# Altium PCB IR2104S_V2.PcbDoc
Units mil, origin at the board's own origin, x right, y up, seen from the top; angles counter-clockwise.
Board outline 3085 x 1190 mil, 2 copper layers (Top Layer, Bottom Layer); 22 components, 22 nets, 82 pads, 14 vias.
Unrouted connection lines stored in the file: 10.
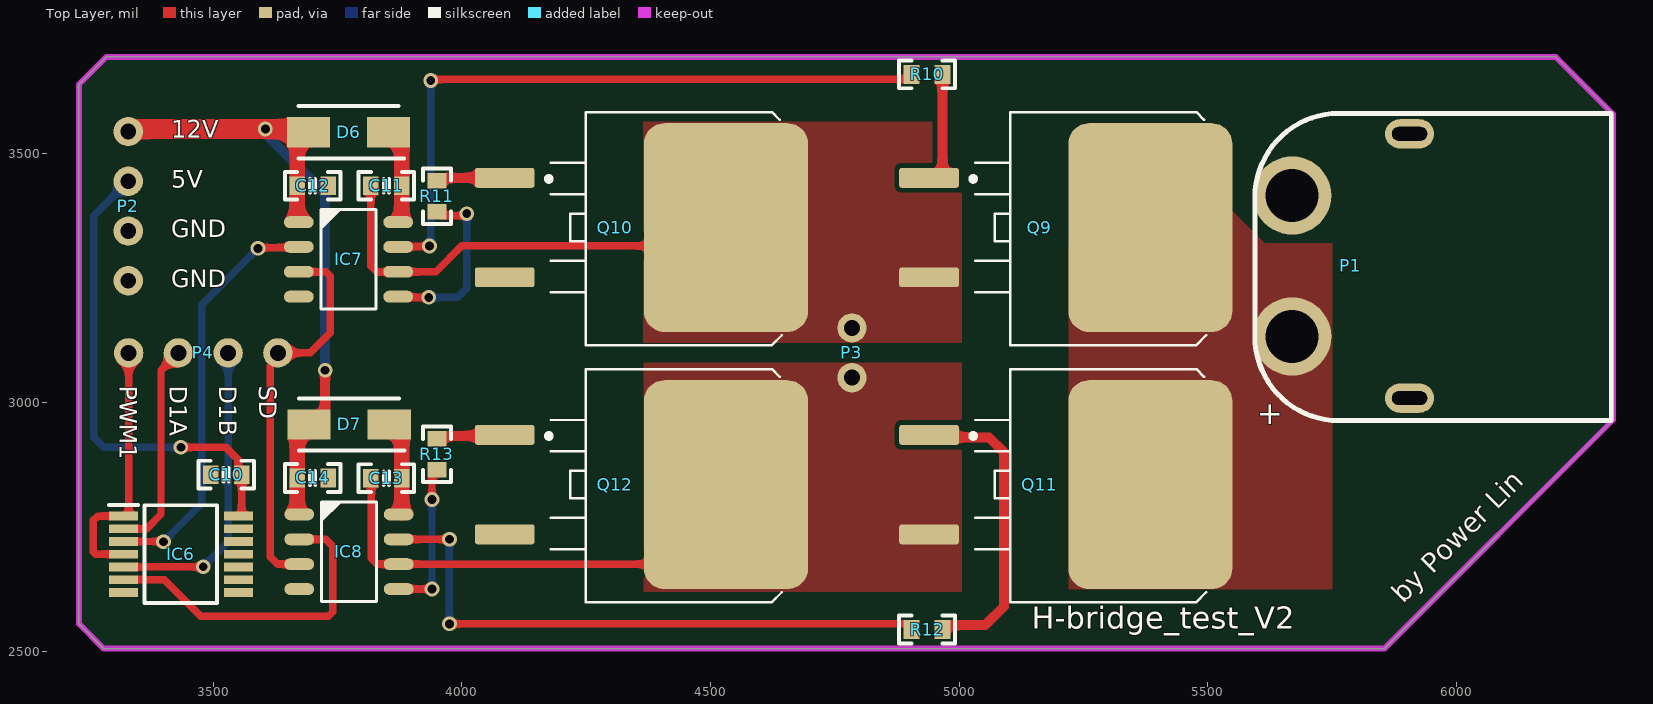
[diagram p0: Top Layer view]
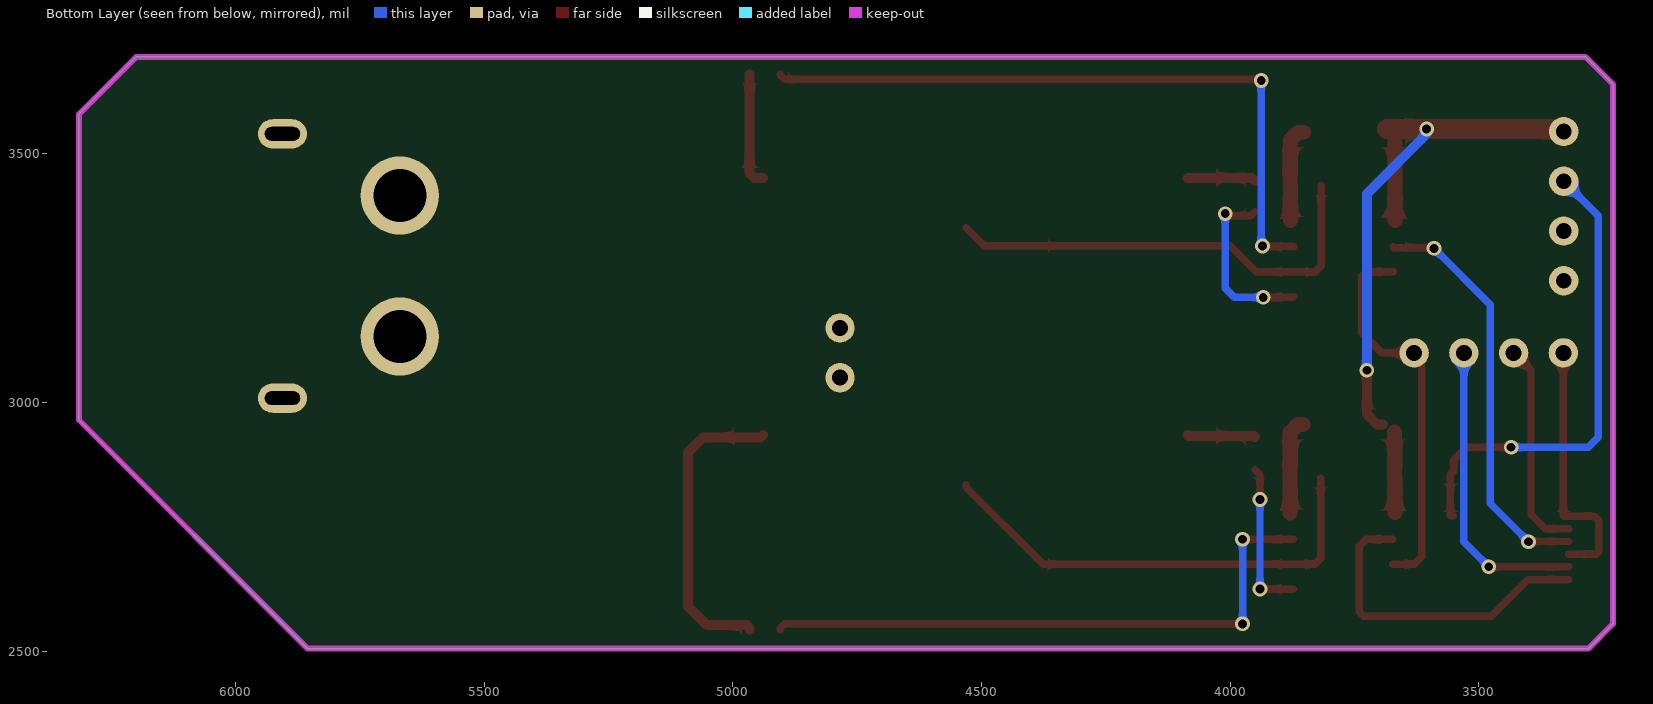
[diagram p1: Bottom Layer view, seen from below]
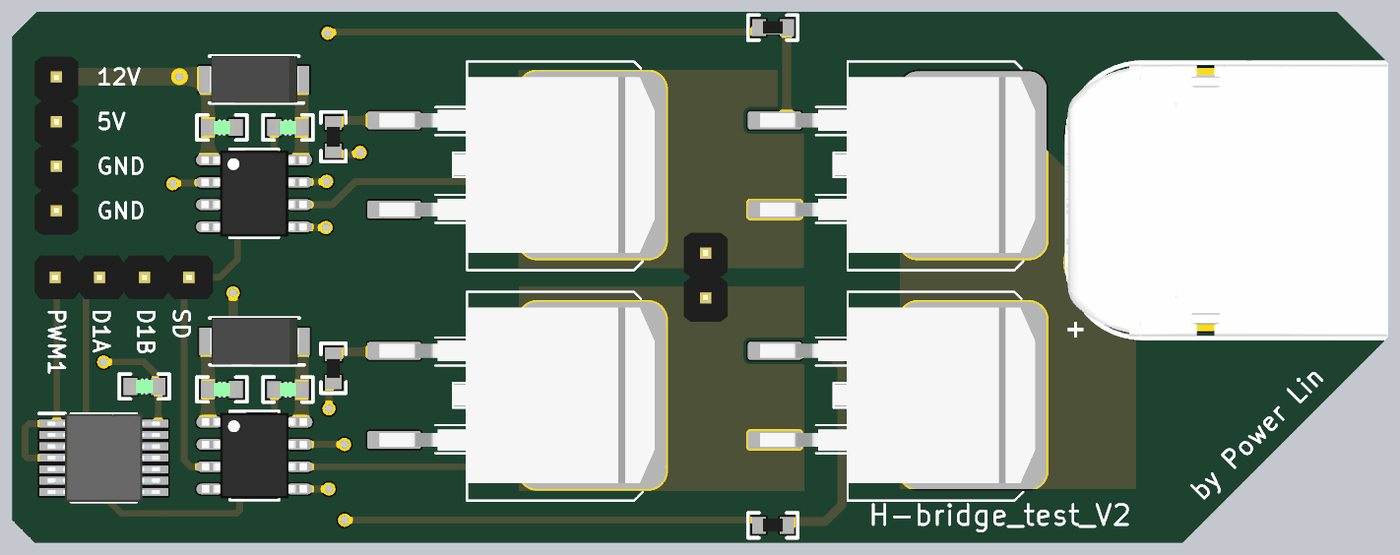
[diagram p2: 3D render of the assembled board from above, using the file's embedded part models]

## Layer stack, top to bottom
Top Solder: solder mask 0.4, Solder Resist, Dk 3.5
Top Layer: signal copper 1.4
Dielectric 1: dielectric 12.6, FR-4, Dk 4.8
Bottom Layer: signal copper 1.4
Bottom Solder: solder mask 0.4, Solder Resist, Dk 3.5

## Board outline
3230,2555 3280,2505 5855,2505 6315,2965 6315,3580 6200,3695 3285,3695 3230,3640

## Design rules (kind name [scope] priority, off if disabled: settings)
Clearance [All] p1: gap=10 ignorepadtopadclearanceinfootprint=FALSE except(0: Arc-Hole Track-Hole SMDPad-Hole THPad-Hole Via-Hole Fill-Hole Poly-Hole Region-Hole Text-Hole)
PlaneConnect [All] p1: planeconnectstyle=Direct reliefexpansion=20 reliefentries=4 reliefconductorwidth=10 reliefairgap=10
PolygonConnect [All] p1: connectstyle=Direct reliefconductorwidth=10 reliefentries=4 polygonreliefangle="90 Angle" airgapwidth=10
RoutingVias [All] p1: holewidth=17.72 width=29.53 viastyle="Through Hole" minholewidth=17.72 minwidth=29.53 maxholewidth=17.72 maxwidth=29.53
SolderMaskExpansion [All] p1: expansion=4 istentingtop=FALSE
Width [All] p1: maxlimit=100 minlimit=15 preferedwidth=15
29 further rules are at their usual default settings.

## Components (designator, comment, footprint, x,y, rotation, side; value= is the part's Value field where it differs from the comment)
C10 "100nF" CAP-0603 3526.1,2855 r0 top
C11 "1uF/25V" CAP-0603 3848.07,3435.95 r180 top
C12 "100nF" CAP-0603 3700,3435.95 r180 top
C13 "1uF/25V" CAP-0603 3848.12,2847.94 r180 top
C14 "100nF" CAP-0603 3700,2848.3 r180 top
D6 "SS14" DO-214AC_SMA 3772.07,3543.64 r180 top
D7 "SS14" DO-214AC_SMA 3773.21,2956 r180 top
IC6 "SN74HC08PW" TSSOP14 3435,2695 r0 top
IC7 "IR2104S" SOIC_8 3772.07,3288 r270 top
IC8 "IR2104S" SOIC_8 3773,2700 r270 top
P1 "XT30" XT60PW-M 5669.65,3416.38 r270 top
P2 "HDR1x4_2.54" HDR1x4_2.54_180 3329.18,3545 r0 top
P3 "HDR1x2_2.54" HDR1X2_2.54_180 4784.54,3150 r0 top
P4 "HDR1x4_2.54" HDR1x4_2.54_180 3330,3100 r90 top
Q9 "IRF3205S" D2PAK-3 5162.01,3351.95 r180 top
Q10 "IRF3205S" D2PAK-3 4308.64,3351.95 r180 top
Q11 "IRF3205S" D2PAK-3 5162.01,2835 r180 top
Q12 "IRF3205S" D2PAK-3 4308.64,2835 r180 top
R10 "51R" R-0603 4935.45,3660 r0 top
R11 "51R" R-0603 3950,3415 r90 top
R12 "51R" R-0603 4935.45,2543.52 r0 top
R13 "51R" R-0603 3950,2896 r90 top

## Footprints (in the part's own frame and the unit in brackets; to place one, negate y for a bottom-side part, rotate by r counter-clockwise, add the part's x,y. Pads: shape width x height; smd on the part's side, far side on the other; paste and mask are expansions set on the pad)
CAP-0603 [mm]
  rect 0.8x0.96 smd: 1(-0.79,0) 2(0.79,0)
  silkscreen extent -1.42,-0.71 1.42,0.71, body extent -0.76,-0.39 0.76,0.39, height 0.9
D2PAK-3 [mil] "D-PAK/TO-263-3; 3 Leads (1 Cropped); Body 14.7 (inc. leads) x 10.2 mm (LxW max)"
  round 20 on Mech15: 0(0,0)
  rrect25% 120x40 smd: 1(222.5,-100) 2(222.5,100)
  rrect25% 330x420 smd: 3(-222.5,0)
  silkscreen extent -335,-232 139,236, body extent -361,-197 256,197, height 189
DO-214AC_SMA [mm]
  rect 2.2x1.55 smd: 1(2.05,0) 2(-2.05,0)
  silkscreen extent -2.83,-1.33 2.55,1.33, body extent -2.55,-1.33 2.55,1.33, height 2.29
HDR1X2_2.54_180 [mm]
  round 1.5 hole 0.813: 1(0,0) 2(0,-2.54)
  body extent -1.25,-3.81 1.25,1.27, height 8.2
HDR1x4_2.54_180 [mm]
  round 1.5 hole 0.813: 1(0,0) 2(0,-2.54) 3(0,-5.08) 4(0,-7.62)
  body extent -1.25,-8.89 1.25,1.27, height 8.2
R-0603 [mm]
  rect 0.8x0.96 smd: 1(-0.79,0) 2(0.79,0)
  silkscreen extent -1.42,-0.71 1.42,0.71, body extent -0.76,-0.38 0.76,0.38, height 0.41
SOIC_8 [mil]
  oval 24x60 smd: 1(-75,-100.02) 2(-25,-100.02) 3(25,-100.02) 4(75,-100.02) 5(75,99.98) 6(25,99.98) 7(-25,99.98) 8(-75,99.98)
  silkscreen extent -100,-55 100,55, body extent -96,-118 96,118, height 69
TSSOP14 [mm]
  rect 1.475x0.45 smd: 1(-2.938,1.95) 2(-2.938,1.3) 3(-2.938,0.65) 4(-2.938,0) 5(-2.938,-0.65) 6(-2.938,-1.3) 7(-2.938,-1.95) 8(2.938,-1.95) 9(2.938,-1.3) 10(2.938,-0.65) 11(2.938,0) 12(2.938,0.65) 13(2.938,1.3) 14(2.938,1.95)
  silkscreen extent -3.67,-2.5 1.85,2.52, body extent -3.2,-2.5 3.2,2.5, height 1.2
XT60PW-M [mm]
  oval 1.5x2.5 hole 0.7 slot 1.8 at 90 deg: 0(-3.15,6) 0(10.35,6)
  round 4 hole 2.7: 1(7.2,0) 2(0,0)
  silkscreen extent -4.2,-1.9 11.5,16.3, body extent -4.3,-1.95 11.6,16.35, height 8.45

## Part data
C10 C11 C12 C13 C14: library part CAP, "贴片电容", Package=0402, SuppliersPartNumber=C52923, ComponentLink1Description=供应商链接, ComponentLink1URL=http://www.szlcsc.com/product/details_53938.html, Supplier=LC
D6 D7: library part DIODE, "二极管", Package=SMA(DO-214AC), SuppliersPartNumber=C22452, ComponentLink1Description=供应商链接, ComponentLink1URL=http://www.szlcsc.com/product/details_23178.html, Supplier=LC
IC6: "Integrated Circuit", Arrow Part Number=SN74HCT08PW, Manufacturer_Name="Texas Instruments", Mouser Part Number=595-SN74HCT08PW, Arrow Price/Stock=https://www.arrow.com/en/products/sn74hct08pw/texas-instruments, Datasheet Link=http://www.ti.com/lit/gpn/SN74HCT08, Height=1.2mm, Manufacturer_Part_Number=SN74HCT08PW, Mouser Price/Stock=https://www.mouser.co.uk/ProductDetail/Texas-Instruments/SN74HCT08PW?qs=7KMwW2o1%252BmRuz7pKtn1cmg%3D%3D
IC7 IC8: "Integrated Circuit", Manufacturer_Name=Infineon, Datasheet Link=http://www.infineon.com/dgdl/ir2104.pdf?fileId=5546d462533600a4015355c7c1c31671, Height=1.75mm, Manufacturer_Part_Number=IR2104S
P1: library part XT30/60, "XT30/60"
P2 P3 P4: "Header"
Q9 Q10 Q11 Q12: library part N-MOS, "N 沟道 MOS", Manufacturer_Name=Nexperia, Manufacturer_Part_Number=SI2302DS, Mouser Part Number=N/A, RS Part Number=7983053P, Datasheet Link=https://assets.nexperia.com/documents/data-sheet/SI2302DS.pdf, Height=1.1mm, Mouser Price/Stock=https://www.mouser.com/Search/Refine.aspx?Keyword=N%2FA, RS Price/Stock=http://uk.rs-online.com/web/p/products/7983053P
R10 R11 R12 R13: library part RES, "贴片电阻", Package=0805, SuppliersPartNumber=C17798, Supplier=LC

## Via types
v1: diameter 29.53, hole 17.72, Top Layer to Bottom Layer, 14 vias

## Nets (pads, with @x,y where several pads share a name; then routed paths per layer and width w, separated by ;. In a path a pad name is that pad's centre, name@x,y a point inside that pad or via, vN(x,y) a via of type N, cw(c..) or ccw(c..) an arc to the next point about the centre after c; other vN are vias at no path point)
5V: C10.2 IC6.14 P2.2 | length 973.2
  Top Layer w15: v1(3435,2910) 3525,2910 3550.37,2884.63 3550.37,2861.83 C10.2 3557.2,2773.13 3556.61,2772.54 IC6.14@3551.44,2772.54
  Bottom Layer w15: P2.2 3260,3375.82 3260,2930 3280,2910 v1(3435,2910)
12V: C12.2 C14.2 D6.1 D7.1 IC7.1 IC8.1 P2.1 | length 1355.5
  Top Layer w20: D6.1@3685,3550 D6.1 ; D7.1 3704.49,2956 3725,2976.51 v1(3725,3065)
  Top Layer w30: IC7.1@3668.73,3366 3668.73,3435.78 C12.2 D6.1@3668.9,3528.13 ; IC8.1@3668.9,2778.53 C14.2 3669.07,2848.48 D7.1@3669.07,2940.66
  Top Layer w40: P2.1 3332.83,3548.65 3346.3,3548.65 3347.66,3550 v1(3604.92,3550) D6.1@3685,3550
  Bottom Layer w20: v1(3604.92,3550) 3604.92,3540.08 3725,3420 v1(3725,3065)
DIR1A: IC6.2 P4.2 | length 427.1
  Top Layer w15: IC6.2 3366.18,2746.18 3395,2775 3395,3065 P4.2
DIR1B: IC6.5 P4.3 | length 611.6
  Top Layer w15: IC6.5 3479.41,2669.41 v1(3480,2670)
  Bottom Layer w15: v1(3480,2670) 3530,2720 P4.3
FUSE: C10.1 C12.1 C14.1 IC6.7 IC7.4 IC8.4 P1.2 P2.3 P2.4 Q10.2 Q12.2
M1A: C11.2 IC7.6 P3.1 Q9.2 Q10.3 | length 916.9
  Top Layer w15: C11.2 3816.97,3275.03 3829,3263 IC7.6 3948,3263 4000,3315 4494.2,3315 Q10.3
M1B: C13.2 IC8.6 P3.2 Q11.2 Q12.3 | length 948.4
  Top Layer w15: C13.2@3817.9,2847.94 3817.9,2687.03 3829.93,2675 IC8.6 4376.21,2675 4531.14,2829.93 Q12.3
NetC11_1: C11.1 D6.2 IC7.8 | length 195
  Top Layer w30: D6.2 3863.66,3543.64 3879.17,3528.13 C11.1 3879,3435.78 IC7.8@3879,3366
NetC13_1: C13.1 D7.2 IC8.8 | length 195
  Top Layer w30: D7.2@3853,2955.81 3863.88,2955.81 3879.39,2940.3 3879.39,2848.12 C13.1 IC8.8@3879.22,2778.17
NetIC7_5: IC7.5 R11.1 | length 361.4
  Top Layer w15: IC7.5 3873.55,3211.5 v1(3933.5,3211.5) ; R11.1 3958.25,3375.65 4005.65,3375.65 v1(4010,3380)
  Bottom Layer w15: v1(3933.5,3211.5) 3991.5,3211.5 4010,3230 v1(4010,3380)
NetIC7_7: IC7.7 R10.1 | length 1370.4
  Top Layer w15: IC7.7 3873.05,3314 3934,3314 v1(3935,3315) ; v1(3937.5,3647.5) 3940,3650 4896.1,3650 4904.34,3658.25 R10.1
  Bottom Layer w15: v1(3935,3315) 3937.5,3317.5 v1(3937.5,3647.5)
NetIC8_5: IC8.5 R13.1 | length 311.1
  Top Layer w15: IC8.5 3935,2625 v1(3940,2625) ; v1(3940,2805) 3940,2854.9 R13.1
  Bottom Layer w15: v1(3940,2625) v1(3940,2805)
NetIC8_7: IC8.7 R12.1 | length 1208
  Top Layer w15: IC8.7 v1(3975,2725) ; v1(3975,2555) 4001,2555 4887.31,2555 4887.39,2554.92 4896.1,2554.92 4904.34,2546.67 R12.1
  Bottom Layer w15: v1(3975,2555) v1(3975,2725)
NetQ9_1: Q9.1 R10.2 | length 229.2
  Top Layer w20: Q9.1 4956.55,3451.95 4966.55,3461.95 R10.2
NetQ10_1: Q10.1 R11.2 | length 138.6
  Top Layer w20: R11.2 3955.75,3451.85 3996.05,3451.85 3996.14,3451.95 Q10.1
NetQ11_1: Q11.1 R12.2 | length 619.5
  Top Layer w20: Q11.1 4944.51,2930 5060,2930 5090,2900 5090,2590 5052.42,2552.42 4972.3,2552.42 4966.55,2546.67 R12.2
NetQ12_1: Q12.1 R13.2 | length 137.8
  Top Layer w20: R13.2@3950,2931.1 3951.95,2933.05 4084.19,2933.05 Q12.1
PWM1: IC6.1 IC6.4 P4.1 | length 527.9
  Top Layer w15: IC6.4 3263.79,2695 3258.79,2700 3258.79,2762.98 3267.57,2771.77 IC6.1 3328.64,2771.77 3330,2773.13 P4.1
PWM1A: IC6.3 IC7.2 | length 832.9
  Top Layer w15: IC6.3 3399.41,2720.59 v1(3400,2720) ; v1(3590,3310) 3591.5,3311.5 3670.55,3311.5 IC7.2
  Bottom Layer w15: v1(3400,2720) 3477.03,2797.03 3477.03,3197.03 v1(3590,3310)
PWM1B: IC6.6 IC8.2 | length 660
  Top Layer w15: IC6.6 3401.18,2643.82 3475,2570 3731.21,2570 3740,2578.79 3740,2711.21 3726.22,2725 IC8.2
SD: IC7.3 IC8.3 P4.4 | length 782.8
  Top Layer w15: IC7.3 3726.21,3263 3735,3254.21 3735,3140 3695,3100 P4.4 3630,3088.08 3615,3073.08 3615,2690 3630,2675 IC8.3
VM: P1.1 Q9.3 Q11.3
pads on no net: IC6.8 IC6.9 IC6.10 IC6.11 IC6.12 IC6.13 P1.0 Q9.0 Q10.0 Q11.0 Q12.0

## Polygon pours and split planes (outlines as drawn)
FUSE on Top Layer "NONET_L01_P-001" (solid, remove dead copper, pour order 4): 3529.78,6306.42 3539.78,6296.42 3539.78,3906.42 7609.78,3906.42 7789.78,4086.42 7719.78,4156.42 7719.78,6566.42
VM on Top Layer "NONET_L01_P-001" (solid, pour order 3): 5545,3390 5620,3315 5545,3315
VM on Top Layer "NONET_L01_P-001" (solid, pour order 2): 5750,2625 5750,3320 5220,3320 5220,2625
M1B on Top Layer "NONET_L01_P-001" (solid, pour order 1): 5005.46,2620 5005.46,3080 4365.46,3080 4365.46,2620
M1A on Top Layer "NONET_L01_P-001" (solid, pour order 0): 5005,3120 5005,3565 4365,3565 4365,3120
FUSE on Bottom Layer "NONET_L01_P-001" (solid, remove dead copper, pour order 5): 3159.78,6306.42 3169.78,6296.42 3169.78,3906.42 7239.78,3906.42 7419.78,4086.42 7349.78,4156.42 7349.78,6566.42

## Keep-outs
Keep-Out Layer:
  lines w12: 3230,2555 3280,2505 5855,2505 6315,2965 6315,3515 6315,3580 6200,3695 3285,3695 3230,3640 3230,2555

## Silkscreen, mask and mechanical layers (free items; w line width, h text height)
Top Overlay:
  text "12V" at 3415.91,3532.29 h35.43
  text "5V" at 3415.91,3432.29 h35.43
  text "GND" at 3415.91,3332.29 h35.43
  text "GND" at 3415.91,3232.29 h35.43
  text "PWM1" at 3312.29,3034.09 h35.43 r270
  text "D1A" at 3412.29,3034.09 h35.43 r270
  text "D1B" at 3512.29,3034.09 h35.43 r270
  text "SD" at 3592.29,3034.09 h35.43 r270
  text "by Power Lin" at 5893.6,2594.75 h40 r45
  text "H-bridge_test_V2" at 5145.91,2545 h45

## Text inside footprints (layer, text, board x,y; h text height)
P1: Top Overlay "+" at 5590.91,3002.99 h78.74 r270